# Altium PCB WoodStoveLayout1.PcbDoc (part 4 of 4)
Units mil, origin at the board's own origin, x right, y up, seen from the top; angles counter-clockwise.
Board outline 4000 x 3000 mil, 4 copper layers (Top Layer, L2, L3, Bottom Layer), stack 64.6 mil thick; 132 components, 92 nets, 551 pads, 53 vias.
Unrouted connection lines stored in the file: 224.
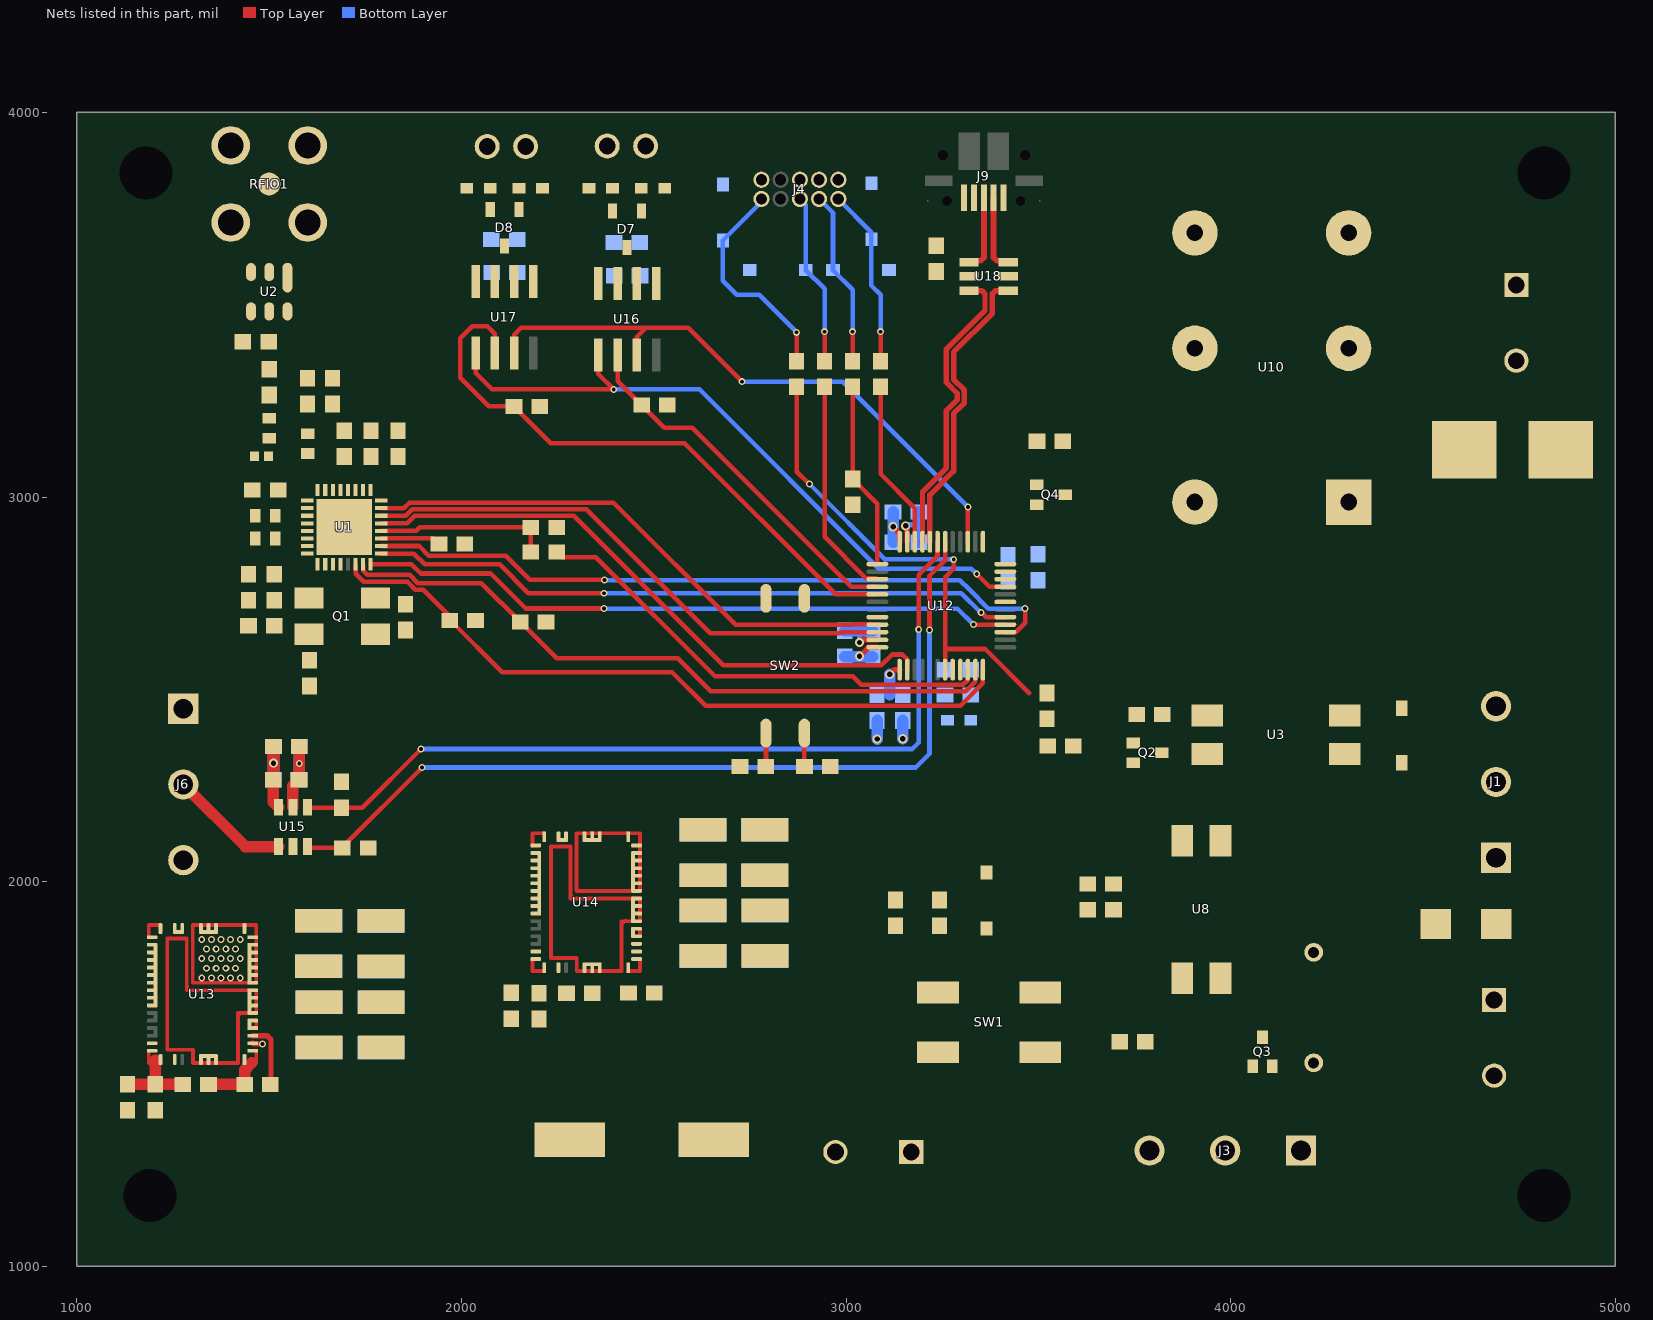
[diagram p4: the nets of this part, all layers, seen from the top]

## Part data (continued)
R8: Case/Package=0603, Case Code (Metric)=1608, Manufacturer=Vishay, Manufacturer Part Number=CRCW0603110RFKEA, Max Operating Temperature=155°C, Max Power Dissipation=100mW, Min Operating Temperature=-55°C, Package Quantity=10, Resistance=110, Supplier Part Number 1=541-110HTR-ND, Temperature Coefficient=100ppm/°C, Tolerance=1%, Voltage Rating=75V, Case Code (Imperial)=0603, ComponentLink1Description=https://datasheet.ciiva.com/11809/0900766b80d98afc-11809778.pdf, ComponentLink1URL=https://datasheet.ciiva.com/11809/0900766b80d98afc-11809778.pdf, ComponentLink2Description=https://datasheet.ciiva.com/2525/dcrcwe3-2525299.pdf, ComponentLink2URL=https://datasheet.ciiva.com/2525/dcrcwe3-2525299.pdf, ComponentLink3Description=https://datasheet.ciiva.com/2525/dcrcwe3-2525300.pdf, ComponentLink3URL=https://datasheet.ciiva.com/2525/dcrcwe3-2525300.pdf, ComponentLink4Description=https://datasheet.ciiva.com/2525/dcrcwe3-2525301.pdf, ComponentLink4URL=https://datasheet.ciiva.com/2525/dcrcwe3-2525301.pdf, ComponentLink5Description=https://datasheet.ciiva.com/7822/1697337-7822981.pdf, ComponentLink5URL=https://datasheet.ciiva.com/7822/1697337-7822981.pdf, ComponentLink6Description=https://datasheet.ciiva.com/16758/70201119-16758821.pdf, ComponentLink6URL=https://datasheet.ciiva.com/16758/70201119-16758821.pdf, ComponentLink7Description=https://datasheet.ciiva.com/3256/dcrcwe3-3256966.pdf, ComponentLink7URL=https://datasheet.ciiva.com/3256/dcrcwe3-3256966.pdf, ComponentLink8Description=https://datasheet.ciiva.com/7822/1697337-7822982.pdf, ComponentLink8URL=https://datasheet.ciiva.com/7822/1697337-7822982.pdf, ComponentLink9Description=https://datasheet.ciiva.com/3256/dcrcwe3-3256967.pdf, ComponentLink9URL=https://datasheet.ciiva.com/3256/dcrcwe3-3256967.pdf, ComponentLink10Description=https://datasheet.ciiva.com/26316/fld-crcw-e3-data-en-26316567.pdf, ComponentLink10URL=https://datasheet.ciiva.com/26316/fld-crcw-e3-data-en-26316567.pdf, ComponentLink11Description=https://datasheet.ciiva.com/16787/70201119-16787496.pdf, ComponentLink11URL=https://datasheet.ciiva.com/16787/70201119-16787496.pdf, ComponentLink12Description=https://datasheet.ciiva.com/7792/125364-7792010.pdf, ComponentLink12URL=https://datasheet.ciiva.com/7792/125364-7792010.pdf, ComponentLink13Description=https://datasheet.ciiva.com/16885/dcrcwe3-16885194.pdf, ComponentLink13URL=https://datasheet.ciiva.com/16885/dcrcwe3-16885194.pdf, ComponentLink14Description=https://datasheet.ciiva.com/22674/1912744-22674701.pdf, ComponentLink14URL=https://datasheet.ciiva.com/22674/1912744-22674701.pdf, ComponentLink15Description=https://datasheet.ciiva.com/22707/1697337-22707342.pdf, ComponentLink15URL=https://datasheet.ciiva.com/22707/1697337-22707342.pdf, Composition="Thick Film", Contact Plating=Tin, Depth=0.85mm, Height=0.45mm, Lead Free="Lead Free", Length=1.55mm, Military Standard=Not, Mount="Surface Mount", Number of Pins=2, Number of Terminations=2, Packaging="Tape and Reel", Power Rating=100mW, Pricing 1="5000=0.00497, 10000=0.00432, 25000=0.00405 (USD)", Radiation Hardening=No, REACH SVHC=Unknown, Stock 1=35000, Supplier 1=Digi-Key, Termination=SMD/SMT, Voltage Rating (DC)=75V, Weight=7.1E-05oz, Width=0.033inch
R9: Case/Package=Axial, Manufacturer="Stackpole Electronics", Manufacturer Part Number=CFM12JT560R, Max Operating Temperature=155°C, Max Power Dissipation=500mW, Min Operating Temperature=-55°C, Package Quantity=5000, Resistance=560, Supplier Part Number 1=S560HTR-ND, Temperature Coefficient=-400ppm/°C, Tolerance=5%, ComponentLink1Description=https://www.seielect.com/Catalog/SEI-CF_CFM.pdf, ComponentLink1URL=https://www.seielect.com/Catalog/SEI-CF_CFM.pdf, Composition="Carbon Film", Contact Plating=Tin,Matte, Diameter=2.3mm, Lead Free="Lead Free", Length=0.256inch, Mount="Through Hole,Axial", Number of Terminations=2, Packaging="Tape and Reel", Pricing 1="5000=0.00703, 10000=0.00611, 25000=0.00537, 50000=0.00492, 125000=0.00482 (USD)", Radiation Hardening=No, Stock 1=0, Supplier 1=Digi-Key
R11: Case/Package=0603, Case Code (Metric)=1608, Manufacturer=Vishay, Manufacturer Part Number=CRCW060368R0FKEA, Max Operating Temperature=155°C, Max Power Dissipation=100mW, Min Operating Temperature=-55°C, Package Quantity=10, Resistance=68, Supplier Part Number 1=541-68.0HTR-ND, Temperature Coefficient=100ppm/°C, Tolerance=1%, Voltage Rating=75V, Case Code (Imperial)=0603, ComponentLink1Description=https://datasheet.ciiva.com/2494/dcrcwe3-2494368.pdf, ComponentLink1URL=https://datasheet.ciiva.com/2494/dcrcwe3-2494368.pdf, ComponentLink2Description=https://datasheet.ciiva.com/11809/0900766b80d98afc-11809013.pdf, ComponentLink2URL=https://datasheet.ciiva.com/11809/0900766b80d98afc-11809013.pdf, ComponentLink3Description=https://datasheet.ciiva.com/8337/dcrcwe3-8337350.pdf, ComponentLink3URL=https://datasheet.ciiva.com/8337/dcrcwe3-8337350.pdf, ComponentLink4Description=https://datasheet.ciiva.com/7777/1697337-7777608.pdf, ComponentLink4URL=https://datasheet.ciiva.com/7777/1697337-7777608.pdf, ComponentLink5Description=https://datasheet.ciiva.com/16770/70201119-16770904.pdf, ComponentLink5URL=https://datasheet.ciiva.com/16770/70201119-16770904.pdf, ComponentLink6Description=https://datasheet.ciiva.com/2494/dcrcwe3-2494366.pdf, ComponentLink6URL=https://datasheet.ciiva.com/2494/dcrcwe3-2494366.pdf, ComponentLink7Description=https://datasheet.ciiva.com/22870/70201119-22870302.pdf, ComponentLink7URL=https://datasheet.ciiva.com/22870/70201119-22870302.pdf, ComponentLink8Description=https://datasheet.ciiva.com/2494/dcrcwe3-2494367.pdf, ComponentLink8URL=https://datasheet.ciiva.com/2494/dcrcwe3-2494367.pdf, ComponentLink9Description=https://datasheet.ciiva.com/16200/dcrcw-16200591.pdf, ComponentLink9URL=https://datasheet.ciiva.com/16200/dcrcw-16200591.pdf, Composition="Thick Film", Contact Plating=Tin, Depth=0.85mm, Height=0.45mm, Lead Free="Lead Free", Length=1.55mm, Military Standard=Not, Number of Terminations=2, Packaging="Tape and Reel", Power Rating=100mW, Pricing 1="5000=0.00497, 10000=0.00432, 25000=0.00405 (USD)", Radiation Hardening=No, REACH SVHC=Unknown, Stock 1=0, Supplier 1=Digi-Key, Termination=SMD/SMT, Voltage Rating (DC)=75V, Weight=7.1E-05oz, Width=0.033inch
R13 R14 R15 R16 R24 R25: Case/Package=0603, Case Code (Metric)=1608, Manufacturer=Vishay, Manufacturer Part Number=CRCW060322R0FKEA, Max Operating Temperature=155°C, Min Operating Temperature=-55°C, Package Quantity=5000, Power Rating=100mW, Resistance=22R, Supplier Part Number 1=541-22.0HTR-ND, Temperature Coefficient=100ppm/°C, Tolerance=1%, Voltage Rating=75V, Case Code (Imperial)=0603, ComponentLink1Description=https://datasheet.ciiva.com/16382/dcrcwe3-16382261.pdf, ComponentLink1URL=https://datasheet.ciiva.com/16382/dcrcwe3-16382261.pdf, ComponentLink2Description=https://datasheet.ciiva.com/5552/dcrcwe3-109170-5552120.pdf, ComponentLink2URL=https://datasheet.ciiva.com/5552/dcrcwe3-109170-5552120.pdf, ComponentLink3Description=https://datasheet.ciiva.com/22700/1697337-22700361.pdf, ComponentLink3URL=https://datasheet.ciiva.com/22700/1697337-22700361.pdf, ComponentLink4Description=https://datasheet.ciiva.com/11809/0900766b80d98afc-11809067.pdf, ComponentLink4URL=https://datasheet.ciiva.com/11809/0900766b80d98afc-11809067.pdf, ComponentLink5Description=https://datasheet.ciiva.com/7672/1697337-7672876.pdf, ComponentLink5URL=https://datasheet.ciiva.com/7672/1697337-7672876.pdf, ComponentLink6Description=https://datasheet.ciiva.com/15159/getdatasheetpartid-33090-15159388.pdf, ComponentLink6URL=https://datasheet.ciiva.com/15159/getdatasheetpartid-33090-15159388.pdf, ComponentLink7Description=https://datasheet.ciiva.com/7672/1697337-7672877.pdf, ComponentLink7URL=https://datasheet.ciiva.com/7672/1697337-7672877.pdf, ComponentLink8Description=https://datasheet.ciiva.com/26316/fld-crcw-e3-data-en-26316590.pdf, ComponentLink8URL=https://datasheet.ciiva.com/26316/fld-crcw-e3-data-en-26316590.pdf, ComponentLink9Description=https://datasheet.ciiva.com/16893/dcrcw-16893903.pdf, ComponentLink9URL=https://datasheet.ciiva.com/16893/dcrcw-16893903.pdf, Composition="Thick Film", Contact Plating=Tin,Lead, Depth=0.85mm, Height=0.45mm, Lead Free="Lead Free", Length=1.55mm, Military Standard=Not, Mount="Surface Mount", Packaging="Tape and Reel", Pricing 1="5000=0.00497, 10000=0.00432, 25000=0.00405 (USD)", Radiation Hardening=No, REACH SVHC=Unknown, Stock 1=0, Supplier 1=Digi-Key, Termination=SMD/SMT, Voltage Rating (DC)=75V, Weight=7.1E-05oz, Width=0.85mm
R22: Case/Package=0603, Case Code (Metric)=1608, Manufacturer=Vishay, Manufacturer Part Number=CRCW060310R0FKEA, Max Operating Temperature=155°C, Max Power Dissipation=100mW, Min Operating Temperature=-55°C, Package Quantity=10, Supplier Part Number 1=541-10.0HTR-ND, Temperature Coefficient=100ppm/°C, Tolerance=1%, Voltage Rating=75V, Case Code (Imperial)=0603, ComponentLink1Description=https://datasheet.ciiva.com/2465/dcrcwe3-2465699.pdf, ComponentLink1URL=https://datasheet.ciiva.com/2465/dcrcwe3-2465699.pdf, ComponentLink2Description=https://datasheet.ciiva.com/2465/dcrcwe3-2465700.pdf, ComponentLink2URL=https://datasheet.ciiva.com/2465/dcrcwe3-2465700.pdf, ComponentLink3Description=https://datasheet.ciiva.com/11808/0900766b80d98afc-11808660.pdf, ComponentLink3URL=https://datasheet.ciiva.com/11808/0900766b80d98afc-11808660.pdf, ComponentLink4Description=https://datasheet.ciiva.com/2465/dcrcwe3-2465701.pdf, ComponentLink4URL=https://datasheet.ciiva.com/2465/dcrcwe3-2465701.pdf, ComponentLink5Description=https://datasheet.ciiva.com/16740/dcrcwe3-16740661.pdf, ComponentLink5URL=https://datasheet.ciiva.com/16740/dcrcwe3-16740661.pdf, ComponentLink6Description=https://datasheet.ciiva.com/26316/fld-crcw-e3-data-en-26316582.pdf, ComponentLink6URL=https://datasheet.ciiva.com/26316/fld-crcw-e3-data-en-26316582.pdf, ComponentLink7Description=https://datasheet.ciiva.com/16781/70201119-16781847.pdf, ComponentLink7URL=https://datasheet.ciiva.com/16781/70201119-16781847.pdf, ComponentLink8Description=https://datasheet.ciiva.com/3256/dcrcwe3-3256955.pdf, ComponentLink8URL=https://datasheet.ciiva.com/3256/dcrcwe3-3256955.pdf, ComponentLink9Description=https://datasheet.ciiva.com/5547/dcrcwe3-109170-5547342.pdf, ComponentLink9URL=https://datasheet.ciiva.com/5547/dcrcwe3-109170-5547342.pdf, ComponentLink10Description=https://datasheet.ciiva.com/22673/1697337-22673071.pdf, ComponentLink10URL=https://datasheet.ciiva.com/22673/1697337-22673071.pdf, Composition="Thick Film", Contact Plating=Tin, Depth=0.85mm, Height=0.45mm, Lead Free="Lead Free", Length=1.55mm, Military Standard=Not, Mount="Surface Mount", Number of Pins=2, Number of Terminations=2, Packaging="Tape and Reel", Power Rating=100mW, Pricing 1="5000=0.00497, 10000=0.00432, 25000=0.00405 (USD)", REACH SVHC=Unknown, Resistance=10, Stock 1=0, Supplier 1=Digi-Key, Termination=SMD/SMT, Voltage Rating (DC)=75V, Weight=7.1E-05oz, Width=0.033inch
R29: Case/Package=0603, Case Code (Metric)=1608, Manufacturer="Vishay Dale", Manufacturer Part Number=M55342E12B40B2RWS, Max Operating Temperature=150°C, Max Power Dissipation=100mW, Min Operating Temperature=-55°C, Package Quantity=1, Resistance=40.2k, Supplier Part Number 1=M55342E12B40B2RWS-MIL, Temperature Coefficient=25ppm/°C, Tolerance=0.1%, Case Code (Imperial)=0603, ComponentLink1Description=https://datasheet.ciiva.com/16884/crcwhpe3-16884389.pdf, ComponentLink1URL=https://datasheet.ciiva.com/16884/crcwhpe3-16884389.pdf, ComponentLink2Description=https://datasheet.ciiva.com/9010/crcwhpe3-9010219.pdf, ComponentLink2URL=https://datasheet.ciiva.com/9010/crcwhpe3-9010219.pdf, ComponentLink3Description=https://datasheet.ciiva.com/2527/crcwhpe3-2527276.pdf, ComponentLink3URL=https://datasheet.ciiva.com/2527/crcwhpe3-2527276.pdf, ComponentLink4Description=https://datasheet.ciiva.com/2527/crcwhpe3-2527277.pdf, ComponentLink4URL=https://datasheet.ciiva.com/2527/crcwhpe3-2527277.pdf, ComponentLink5Description=https://datasheet.ciiva.com/2527/crcwhpe3-2527278.pdf, ComponentLink5URL=https://datasheet.ciiva.com/2527/crcwhpe3-2527278.pdf, ComponentLink6Description=http://www.vishay.com/docs/60018/eh.pdf, ComponentLink6URL=http://www.vishay.com/docs/60018/eh.pdf, Composition="Thin Film", Failure Rate=0.01%, Height=0.033inch, Length=0.064inch, Number of Terminations=2, Packaging=Tray, Stock 1=0, Supplier 1=Digi-Key, Width=0.032inch
R30: Case/Package=0603, Case Code (Metric)=1608, Manufacturer="TE Connectivity", Manufacturer Part Number=8-2176089-5, Max Operating Temperature=155°C, Max Power Dissipation=167mW, Min Operating Temperature=-55°C, Package Quantity=1, Resistance=88.7k, Supplier Part Number 1=A110295TR-ND, Temperature Coefficient=25ppm/°C, Tolerance=0.1%, Case Code (Imperial)=0603, ComponentLink1Description=https://datasheet.ciiva.com/41810/eng-ds-1773272-j-41810143.pdf, ComponentLink1URL=https://datasheet.ciiva.com/41810/eng-ds-1773272-j-41810143.pdf, ComponentLink2Description=https://datasheet.ciiva.com/41821/eng-ds-1773272-j-41821583.pdf, ComponentLink2URL=https://datasheet.ciiva.com/41821/eng-ds-1773272-j-41821583.pdf, Composition="Thin Film", Height=0.022inch, Length=0.061inch, Number of Terminations=2, Packaging="Tape and Reel", Pricing 1="1000=0.14518, 2000=0.1432 (USD)", Stock 1=0, Supplier 1=Digi-Key, Width=0.031inch
R32: Case/Package=0603, Case Code (Metric)=1608, Manufacturer="TE Connectivity", Manufacturer Part Number=3-2176089-1, Max Operating Temperature=155°C, Max Power Dissipation=167mW, Min Operating Temperature=-55°C, Package Quantity=1000, Power Rating=166mW, Resistance=23.2kR, Supplier Part Number 1=A110239TR-ND, Temperature Coefficient=25ppm/°C, Tolerance=0.1%, Voltage Rating=100V, Case Code (Imperial)=0603, ComponentLink1Description=https://datasheet.ciiva.com/41825/eng-ds-1773272-j-41825125.pdf, ComponentLink1URL=https://datasheet.ciiva.com/41825/eng-ds-1773272-j-41825125.pdf, ComponentLink2Description=https://datasheet.ciiva.com/41807/eng-ds-1773272-j-41807015.pdf, ComponentLink2URL=https://datasheet.ciiva.com/41807/eng-ds-1773272-j-41807015.pdf, ComponentLink3Description=https://datasheet.ciiva.com/41818/eng-ds-1773272-j-41818073.pdf, ComponentLink3URL=https://datasheet.ciiva.com/41818/eng-ds-1773272-j-41818073.pdf, Composition="Thin Film", Height=0.022inch, Length=0.061inch, Mount="Surface Mount", Number of Terminations=2, Packaging="Cut Tape", Pricing 1="1000=0.14518, 2000=0.1432 (USD)", REACH SVHC="No SVHC", Stock 1=1000, Supplier 1=Digi-Key, Voltage Rating (DC)=100V, Width=0.031inch
R33: Case/Package=0603, Case Code (Metric)=1608, Manufacturer="TE Connectivity", Manufacturer Part Number=2176090-2, Max Operating Temperature=155°C, Max Power Dissipation=167mW, Min Operating Temperature=-55°C, Package Quantity=1000, Resistance=133kR, Supplier Part Number 1=A110312TR-ND, Temperature Coefficient=25ppm/°C, Tolerance=0.1%, Case Code (Imperial)=0603, ComponentLink1Description=https://datasheet.ciiva.com/41823/eng-ds-1773272-j-41823608.pdf, ComponentLink1URL=https://datasheet.ciiva.com/41823/eng-ds-1773272-j-41823608.pdf, ComponentLink2Description=https://datasheet.ciiva.com/41810/eng-ds-1773272-j-41810377.pdf, ComponentLink2URL=https://datasheet.ciiva.com/41810/eng-ds-1773272-j-41810377.pdf, ComponentLink3Description=https://datasheet.ciiva.com/41824/eng-ds-1773272-j-41824430.pdf, ComponentLink3URL=https://datasheet.ciiva.com/41824/eng-ds-1773272-j-41824430.pdf, Composition="Thin Film", Depth=0.8mm, Height=0.022inch, Length=0.061inch, Military Standard=Not, Number of Terminations=2, Packaging="Tape and Reel", Pricing 1="1000=0.14518, 2000=0.1432 (USD)", Stock 1=0, Supplier 1=Digi-Key, Width=0.031inch
R39: Case/Package=0603, Case Code (Metric)=1608, Manufacturer=Panasonic, Manufacturer Part Number=ERJ-3EKF1502V, Max Operating Temperature=155°C, Max Power Dissipation=100mW, Min Operating Temperature=-55°C, Package Quantity=1, Resistance=15k, Supplier Part Number 1=P15.0KHTR-ND, Temperature Coefficient=100ppm/°C, Tolerance=1%, Voltage Rating=75V, Case Code (Imperial)=0603, ComponentLink1Description=https://datasheet.ciiva.com/16770/70260748-16770997.pdf, ComponentLink1URL=https://datasheet.ciiva.com/16770/70260748-16770997.pdf, ComponentLink2Description=https://datasheet.ciiva.com/7830/426256-7830982.pdf, ComponentLink2URL=https://datasheet.ciiva.com/7830/426256-7830982.pdf, ComponentLink3Description=https://datasheet.ciiva.com/24026/aoa0000ce2-24026054.pdf, ComponentLink3URL=https://datasheet.ciiva.com/24026/aoa0000ce2-24026054.pdf, ComponentLink4Description=https://datasheet.ciiva.com/6138/aoa0000ce2-6138183.pdf, ComponentLink4URL=https://datasheet.ciiva.com/6138/aoa0000ce2-6138183.pdf, ComponentLink5Description=https://datasheet.ciiva.com/48530/aoa0000ce2-48530983.pdf, ComponentLink5URL=https://datasheet.ciiva.com/48530/aoa0000ce2-48530983.pdf, ComponentLink6Description=https://datasheet.ciiva.com/9193/aoa0000ce2-9193001.pdf, ComponentLink6URL=https://datasheet.ciiva.com/9193/aoa0000ce2-9193001.pdf, ComponentLink7Description=https://datasheet.ciiva.com/16762/70260748-16762729.pdf, ComponentLink7URL=https://datasheet.ciiva.com/16762/70260748-16762729.pdf, ComponentLink8Description=https://datasheet.ciiva.com/22722/426256-22722779.pdf, ComponentLink8URL=https://datasheet.ciiva.com/22722/426256-22722779.pdf, ComponentLink9Description=https://datasheet.ciiva.com/7830/aoa0000ce2-7830732.pdf, ComponentLink9URL=https://datasheet.ciiva.com/7830/aoa0000ce2-7830732.pdf, ComponentLink10Description=https://datasheet.ciiva.com/46372/1678782-46372846.pdf, ComponentLink10URL=https://datasheet.ciiva.com/46372/1678782-46372846.pdf, ComponentLink11Description=https://datasheet.ciiva.com/46372/1678782-46372847.pdf, ComponentLink11URL=https://datasheet.ciiva.com/46372/1678782-46372847.pdf, Composition="Thick Film", Contact Plating=Tin, Depth=0.8mm, Height=0.022inch, Lead Free="Lead Free", Length=1.6mm, Military Standard=Not, Mount="Surface Mount", Number of Pins=2, Number of Terminations=2, Packaging="Tape and Reel", Power Rating=100mW, Pricing 1="5000=0.00751, 10000=0.00653, 25000=0.00573, 50000=0.00526, 125000=0.00515 (USD)", Radiation Hardening=No, REACH SVHC="No SVHC", Stock 1=0, Supplier 1=Digi-Key, Termination=SMD/SMT, Voltage Rating (DC)=75V, Width=0.031inch
RFIO1: "RF Connector SMA Straight PCB Jack Surface Mount 50 Ohm", Part No=132134-15
SW1: Case/Package=SMD/SMT, Contact Current Rating=50mA, Contact Resistance=100mR, IP Rating="IP67,Waterproof,Dust Tight", Manufacturer=Omron, Max Operating Temperature=70°C, Max Voltage Rating (DC)=24V, Min Operating Temperature=-25°C, Operating Force=1.57N, Package Quantity=1, Supplier Part Number 1=SW261TR-ND, ComponentLink1Description=https://datasheet.ciiva.com/1532/en-b3sn-1532676.pdf, ComponentLink1URL=https://datasheet.ciiva.com/1532/en-b3sn-1532676.pdf, ComponentLink2Description=https://datasheet.ciiva.com/16154/en-b3sn-16154998.pdf, ComponentLink2URL=https://datasheet.ciiva.com/16154/en-b3sn-16154998.pdf, ComponentLink3Description=https://datasheet.ciiva.com/2900/b3sn-1110-2900023.pdf, ComponentLink3URL=https://datasheet.ciiva.com/2900/b3sn-1110-2900023.pdf, ComponentLink4Description=https://datasheet.ciiva.com/5283/en-b3sn-371257-5283623.pdf, ComponentLink4URL=https://datasheet.ciiva.com/5283/en-b3sn-371257-5283623.pdf, ComponentLink5Description=https://datasheet.ciiva.com/2900/b3sn-1110-2900024.pdf, ComponentLink5URL=https://datasheet.ciiva.com/2900/b3sn-1110-2900024.pdf, ComponentLink6Description=https://datasheet.ciiva.com/2900/b3sn-1110-2900025.pdf, ComponentLink6URL=https://datasheet.ciiva.com/2900/b3sn-1110-2900025.pdf, ComponentLink7Description=https://datasheet.ciiva.com/15183/getdatasheetpartid-87284-15183738.pdf, ComponentLink7URL=https://datasheet.ciiva.com/15183/getdatasheetpartid-87284-15183738.pdf, ComponentLink8Description=https://datasheet.ciiva.com/30076/en-b3sn-30076973.pdf, ComponentLink8URL=https://datasheet.ciiva.com/30076/en-b3sn-30076973.pdf, Contact Material=Gold, Contact Plating=Gold, Current Rating=50mA, Depth=7mm, Electrical Life=50000Cycles, Height=3.1mm, Illumination Type=Non-Illuminated,Illuminated, Lead Free="Contains Lead", Length=6.5mm, Manufacturer Part Number=B3SN-3012P, Max Current Rating=50mA, Mechanical Life=100000Cycles, Mount="Surface Mount", Number of Poles=1, Orientation=Straight, Packaging="Tape and Reel", Pricing 1="3000=0.52365 (USD)", Radiation Hardening=No, REACH SVHC=Unknown, Stock 1=48000, Supplier 1=Digi-Key, Switch Function=Off-Mom, Switch Travel=0.25mm, Termination=SMD/SMT, Throw Configuration=SPST, Voltage Rating (DC)=24V, Weight=0.007055oz
SW2: Current Rating=100mA, Manufacturer=CTS, Manufacturer Part Number=219-2MSTR, Max Operating Temperature=85°C, Max Voltage Rating (DC)=20V, Min Operating Temperature=-55°C, Package Quantity=1000, Supplier Part Number 1=CT3114TR-ND, ComponentLink1Description=https://datasheet.ciiva.com/15210/getdatasheetpartid-92384-15210150.pdf, ComponentLink1URL=https://datasheet.ciiva.com/15210/getdatasheetpartid-92384-15210150.pdf, ComponentLink2Description=https://datasheet.ciiva.com/8679/219-8679450.pdf, ComponentLink2URL=https://datasheet.ciiva.com/8679/219-8679450.pdf, ComponentLink3Description=https://datasheet.ciiva.com/16316/219-16316219.pdf, ComponentLink3URL=https://datasheet.ciiva.com/16316/219-16316219.pdf, Contact Material=Copper, Contact Plating=Tin,Gold, Depth=9.91mm, Electrical Life=2000Cycles, Lead Free="Lead Free", Length=0.258inch, Max Current Rating=100mA, Mechanical Life=2000Cycles, Mount="Surface Mount", Number of Positions=2, Orientation=Straight, Packaging="Tape and Reel", Pitch=0.1inch, Pricing 1="1000=0.441, 5000=0.3591 (USD)", Radiation Hardening=No, Stock 1=16000, Supplier 1=Digi-Key, Terminal Pitch=2.54mm, Termination="Gull Wing", Throw Configuration=SPST, Voltage Rating (DC)=20V, Washable=Yes
U1: "SX1211I084"
U3 U8: "OPTOISOLATOR 5KV TRANSISTOR 4SMD 20mA/1.2V saturation", Case/Package=SMD/SMT, Collector Emitter Saturation Voltage=200mV, Current Transfer Ratio=600%, Forward Current=50mA, Forward Voltage=1.4V, Isolation Voltage=5kV, Manufacturer="ON Semiconductor / Fairchild", Max Operating Temperature=110°C, Max Output Voltage=70V, Max Power Dissipation=200mW, Min Operating Temperature=-55°C, Package Quantity=1, Reverse Breakdown Voltage=6V, Supplier Part Number 1=FOD817D3SDTR-ND, Collector Emitter Voltage (VCEO)=200mV, ComponentLink1Description=https://datasheet.ciiva.com/25620/0900766b810e24fa-25620565.pdf, ComponentLink1URL=https://datasheet.ciiva.com/25620/0900766b810e24fa-25620565.pdf, ComponentLink2Description=https://datasheet.ciiva.com/26122/fod817d-26122105.pdf, ComponentLink2URL=https://datasheet.ciiva.com/26122/fod817d-26122105.pdf, ComponentLink3Description=https://datasheet.ciiva.com/15118/getdatasheetpartid-67082-15118458.pdf, ComponentLink3URL=https://datasheet.ciiva.com/15118/getdatasheetpartid-67082-15118458.pdf, ComponentLink4Description=https://datasheet.ciiva.com/2086/fod817d-2086155.pdf, ComponentLink4URL=https://datasheet.ciiva.com/2086/fod817d-2086155.pdf, ComponentLink5Description=https://datasheet.ciiva.com/46433/1563587-46433595.pdf, ComponentLink5URL=https://datasheet.ciiva.com/46433/1563587-46433595.pdf, ComponentLink6Description=https://datasheet.ciiva.com/2086/fod817d-2086156.pdf, ComponentLink6URL=https://datasheet.ciiva.com/2086/fod817d-2086156.pdf, ComponentLink7Description=https://datasheet.ciiva.com/2086/fod817d-2086157.pdf, ComponentLink7URL=https://datasheet.ciiva.com/2086/fod817d-2086157.pdf, ComponentLink8Description=https://datasheet.ciiva.com/8095/fod817d-8095549.pdf, ComponentLink8URL=https://datasheet.ciiva.com/8095/fod817d-8095549.pdf, ComponentLink9Description=https://datasheet.ciiva.com/4701/fod817d-4701711.pdf, ComponentLink9URL=https://datasheet.ciiva.com/4701/fod817d-4701711.pdf, ComponentLink10Description=https://datasheet.ciiva.com/17001/fod817-17001647.pdf, ComponentLink10URL=https://datasheet.ciiva.com/17001/fod817-17001647.pdf, Fall Time=18000ns, Input Current=50mA, Lead Free="Lead Free", Manufacturer Part Number=FOD817D3SD, Max Collector Current=50mA, Max Input Current=50mA, Mount="Surface Mount", Number of Channels=1, Number of Circuits=1, Number of Elements=1, Number of Pins=4, Output Current per Channel=50mA, Output Voltage=70V, Packaging="Tape and Reel", Power Dissipation=200mW, Pricing 1="1000=0.15939, 2000=0.14611, 5000=0.13283, 10000=0.12397, 25000=0.11954, 50000=0.11512 (USD)", Radiation Hardening=No, REACH SVHC="No SVHC", Rise Time=18000ns, Stock 1=123000, Supplier 1=Digi-Key, Weight=0g
U5: "DIODE SCHOTTKY 40V 1A SOD123"
U10: "RELAY GENERAL PURPOSE DPST 8A 3V 67mA coil drive 45ohm coil resistance"
U11: Case/Package=SMD/SMT, Current Rating=2A, DC Cold Resistance=39mR, Manufacturer=Bel, Manufacturer Part Number=SSQ2, Max Operating Temperature=125°C, Min Operating Temperature=-55°C, Supplier Part Number 1=507-1048-2-ND, Voltage Rating (AC)=125V, Approvals=CSA,CE,cULus, ComponentLink1Description=https://datasheet.ciiva.com/300/ssq-300722.pdf, ComponentLink1URL=https://datasheet.ciiva.com/300/ssq-300722.pdf, ComponentLink2Description=https://datasheet.ciiva.com/300/ssq-300723.pdf, ComponentLink2URL=https://datasheet.ciiva.com/300/ssq-300723.pdf, ComponentLink3Description=https://datasheet.ciiva.com/300/ssq-300724.pdf, ComponentLink3URL=https://datasheet.ciiva.com/300/ssq-300724.pdf, Fuse Type="Board Mount (Cartridge Style Excluded)", Height=0.1inch, Length=0.24inch, Mount="Surface Mount", Packaging="Tape and Reel", Pricing 1="1000=0.15908, 2000=0.14847, 3000=0.14582, 5000=0.14317, 10000=0.13787 (USD)", Stock 1=59000, Supplier 1=Digi-Key, Voltage Rating (DC)=125V, Width=0.1inch
U12: library part STM32L433CCTx
U13 U14: "4V to 36V, 2A Step-Down DC/DC Power Module"
U15: "Self-Calibrating, 16-Bit Analog-to-Digital Converter 6-SOT-23 -40 to 85"
U16 U17: "K type thermocouple amplifier"
U18: "2-Channel Ultra Low Clamp Voltage ESD Solution with Series-Resistor Isolation 6-SOT-23 -40 to 85", Package="SOT-23-6 Texas Instruments", Availability=Good, MF="Texas Instruments", MP=TPD2S017DBVR, Price="0.32 USD", SnapEDA_Link=https://www.snapeda.com/parts/TPD2S017DBVR/Texas%20Instruments/view-part/?ref=snap

## Free pads (board coordinates)
  round 60 hole 137.8 unplated: 2(1180,3842) 2(1191,1184) 2(4815,1184) 2(4815,3842)

## Via types
v1: diameter 18, hole 10, Top Layer to Bottom Layer, tented top, 23 vias
v2: diameter 18, hole 10, Top Layer to Bottom Layer, 22 vias
v3: diameter 24, hole 14, Top Layer to Bottom Layer, 8 vias

## Nets (pads, with @x,y where several pads share a name; then routed paths per layer and width w, separated by ;. In a path a pad name is that pad's centre, name@x,y a point inside that pad or via, vN(x,y) a via of type N, cw(c..) or ccw(c..) an arc to the next point about the centre after c; other vN are vias at no path point)
3VSWRelief: U14.9 U14.10 U14.11
"5V PWM": J1.3 U3.4 U5.C
5VSWRelief: U13.9 U13.10 U13.11
12V: J3.1 Q3.3
12VFAN: D?.1 J1.1 J2.1
+3V3: C1.2 C16.2 C17.2 C18.2 C19.2 C20.2 C21.2 C22.2 C23.2 C39.2 C40.2 C41.2 C42.2 C43.2 C48.2 C49.2 C50.2 C51.2 FB1.1 J4.1 R1.2 R4.2 R5.2 R8.1 R10.2 R11.1 R17.2 R22.2 R23.2 R27.2 R32.2 R35.2 R36.2 R37.2 R38.2 U1.26 U12.1 U12.24 U12.36 U12.48 U14.6 U14.7 U14.8 U16.4 U17.4 | length 337.5
  Top Layer w14: v3(3035,2586) 3058.3,2609.3 U12.48@3081.52,2609.3 ; v3(3114,2539) 3126.23,2551.23 U12.1@3139.59,2551.23 ; v3(3122.4,2922.6) 3139.59,2905.41 U12.36@3139.59,2883.91
  Bottom Layer w14: v3(3122.4,2922.6) v3@3122.4,2927
  Bottom Layer w30: C21.2@2996.86,2585.11 C17.2@3069.85,2585.11 ; 3114,2486.04 v3(3114,2539) ; C18.2@3122.4,2882.57 v3(3122.4,2922.6) ; v3@3122.4,2927 C22.2@3122.4,2961.49
+5V: C29.2 C30.2 C31.2 C32.2 C33.2 C44.2 C45.2 C46.2 C47.2 J6.1 R29.2 U13.6 U13.7 U13.8 U15.5 | length 251.6
  Top Layer w30: U15.5@1562,2193.66 1562,2249 C45.2@1578,2265 v2@1578,2307.39 ; v2(1578.39,2307.39) C44.2@1578.39,2351.48
  Bottom Layer w30: C46.2@1578,2265 1578.39,2265.39 v2(1578.39,2307.39) ; v2@1578,2307 v2(1578.39,2307.39) ; C47.2@1578.39,2351.48 v2(1578.39,2307.39)
  other v1: 1325,1750 1350,1750 1375,1750 1400,1750 1425,1750 1337.5,1775 1362.5,1775 1387.5,1775 1412.5,1775 1325,1800 1350,1800 1375,1800 1400,1800 1425,1800 1337.5,1825 1362.5,1825 1387.5,1825 1412.5,1825 1325,1850 1350,1850 1375,1850 1400,1850 1425,1850
+12V: C25.2 C26.2 C27.2 C28.2 C34.1 C35.2 C36.2 C37.2 C38.2 J10.2 U13.2 U13.4 U14.2 U14.4 | length 26.1
  Top Layer w14: U13.2@1457.7,1579.95 U13.2@1457.7,1579.95 1459.75,1578 v2(1483,1578)
"AC In": J5.2 U11.1
"AC Out": J5.1 U10.4
ACFUSE: U10.3 U11.2
DoorSig: J3.2 Q3.1
FANGND: D?.2 J1.2 J2.2 U3.3 U5.A
GND: C1.1 C2.1 C3.1 C4.2 C6.1 C7.1 C8.1 C11.2 C14.1 C15.1 C16.1 C17.1 C18.1 C19.1 C20.1 C21.1 C22.1 C23.1 C25.1 C26.1 C27.1 C28.1 C30.1 C31.1 C32.1 C33.1 C34.2 C35.1 C36.1 C37.1 C38.1 C40.1 C41.1 C42.1 C43.1 C44.1 C45.1 C46.1 C47.1 C48.1 C49.1 C50.1 C51.1 D2.A D3.A D4.A D5.A D6.A D7.3 D8.3 J3.3 J4.3 J4.5 J4.9 J6.3 J9.5 J10.1 Q1.2 Q1.4 Q2.2 Q4.2 R3.1 R7.1 R25.2 R28.1 R39.1 RFIO1.P1 RFIO1.P2 RFIO1.P3 RFIO1.P4 SW1.3 SW1.4 U1.0 U1.1 U1.2 U1.8 U1.9 U1.12 U1.24 U1.25 U1.30 U1.32 U2.1 U2.3 U2.4 U2.6 U8.2 U8.3 U10.5 U10.6 U12.8 U12.23 U12.35 U12.47 U13.5 U13.14 U13.18 U14.5 U14.14 U14.18 U15.2 U15.6 U16.1 U17.1 U18.2 | length 662.5
  Top Layer w14: v3(3035,2622) 3041.99,2628.99 U12.47@3081.52,2628.99 ; v3(3155,2925) 3159.28,2920.72 U12.35@3159.28,2883.91
  Top Layer w30: C44.1@1511.46,2351.48 v3(1511.46,2308.44) 1511.46,2265.39 C45.1@1511.07,2265 1511.07,2207.19 U15.6@1524.6,2193.66
  Bottom Layer w14: 3033,2652.04 3035,2650.04 v3(3035,2622) ; v3(3155,2925) 3152,2928 3189.32,2928
  Bottom Layer w30: C46.1@1511.07,2265 1511.46,2265.39 v3(1511.46,2308.44) C47.1@1511.46,2351.48 ; C21.1@2996.86,2652.04 3033,2652.04 C17.1@3069.85,2652.04 ; v3(3080.86,2371) C20.1@3080.86,2419.11 ; v3(3147.59,2371.59) C16.1@3147.59,2419.11 ; C18.1@3189.32,2882.57 3189.32,2928 C22.1@3189.32,2961.49
NetC2_2: C2.2 U1.27
NetC3_2: C3.2 U1.28
NetC4_1: C4.1 Q1.3 U1.11
NetC5_1: C5.1 C6.2 U2.5
NetC5_2: C5.2 L2.1
NetC7_2: C7.2 Q1.1 U1.10
NetC8_2: C8.2 L1.1 L2.2 U1.31
NetC9_1: C9.1 C12.1 U1.6
NetC9_2: C9.2 R6.2 U1.7
NetC10_1: C10.1 R7.2
NetC10_2: C10.2 L1.2 U1.29
NetC11_1: C11.1 L3.1 L4.1 U1.3
NetC12_2: C12.2 R6.1
NetC13_2: C13.2 R25.1
NetC14_2: C14.2 C15.2 FB1.2 U12.9
NetC29_1: C29.1 R29.1 R31.2 U13.15 U13.16 | length 206.4
  Top Layer w30: C29.1@1131.8,1472.91 R29.1@1204.16,1472.91 ; 1204.16,1535.68 1204.16,1528.77 R29.1@1204.16,1472.91 ; R31.2@1275.42,1472.91 R29.1@1204.16,1472.91
NetC39_1: C39.1 R32.1 R34.2 U14.15 U14.16
NetD1_1: D1.1 R10.1 U8.4 U12.19
NetD1_2: D1.2 R11.2
NetD2_C: D2.C J4.2 R16.2 | length 467.1
  Top Layer w12: R16.2@3090,3353.46 v2(3090,3430)
  Bottom Layer w12: J4.2@2980,3775.04 3066.04,3689.01 D2.C@3066.04,3670 3066.04,3550 3090,3526.04 v2(3090,3430)
NetD3_C: D3.C J4.4 R15.2 | length 457.7
  Top Layer w12: R15.2@3017.21,3353.46 v2(3017.21,3430)
  Bottom Layer w12: J4.4@2930,3775.04 2966.26,3738.79 D3.C@2966.26,3590 3017.21,3539.05 v2(3017.21,3430)
NetD4_C: D4.C J4.6 R14.2 | length 448.3
  Top Layer w12: R14.2@2944.42,3353.46 v2(2944.42,3430)
  Bottom Layer w12: J4.6@2880,3775.04 2895.67,3759.37 D4.C@2895.67,3590 2944.42,3541.25 v2(2944.42,3430)
NetD5_C: D5.C J4.10 R13.2 | length 576.4
  Top Layer w12: R13.2@2871.63,3353.46 v2(2871.63,3428.37)
  Bottom Layer w12: J4.10@2780,3775.04 2780,3767.17 D5.C@2680,3667.17 2680,3562 2715.96,3526.04 2773.96,3526.04 v2(2871.63,3428.37)
NetD6_C: D6.C R23.1 R24.2 SW1.1 SW1.2
NetD7_1: D7.1 FB2.2 U16.2
NetD7_2: D7.2 FB3.2 U16.3
NetD8_1: D8.1 FB4.2 U17.2
NetD8_2: D8.2 FB5.2 U17.3
NetFB2_1: FB2.1 J7.2
NetFB3_1: FB3.1 J7.1
NetFB4_1: FB4.1 J8.2
NetFB5_1: FB5.1 J8.1
NetJ9_4: J9.4 R39.2
NetL3_2: L3.2 U1.4
NetL4_2: L4.2 U1.5
NetQ2_1: Q2.1 U12.22
NetQ2_3: Q2.3 U3.2
NetQ3_2: Q3.2 R9.2
NetQ4_1: Q4.1 U12.25
NetQ4_3: Q4.3 U10.1
NetR1_1: R1.1 R2.1 U1.20 | length 456.7
  Top Layer w12: U1.20@1791.59,2912.11 1883.08,2912.11 1892.04,2921.06 R1.1@2180.63,2921.06 R2.1@2180.63,2857.06
NetR2_2: R2.2 U12.10 | length 1244.4
  Top Layer w12: R2.2@2247.56,2857.06 2261.24,2843.37 2349.84,2843.37 2659.41,2533.8 3017.42,2533.8 3039.53,2511.69 3304.07,2511.69 3316.66,2524.28 3316.66,2551.14 U12.10@3316.76,2551.23
NetR3_2: R3.2 U1.19 | length 156.2
  Top Layer w12: U1.19@1791.59,2892.42 1791.9,2892.74 1926.95,2892.74 R3.2@1941.63,2878.06
NetR4_1: R4.1 U1.14 U12.12 | length 1865
  Top Layer w12: U1.14@1724.86,2825.69 1724.86,2800.39 1745.86,2779.39 1859.96,2779.39 1879.96,2759.39 1900.38,2759.39 1969.63,2690.14 R4.1@1969.63,2679.06 1971.6,2679.06 2105.8,2544.86 2547.67,2544.86 2635.3,2457.22 3297.69,2457.22 3356.03,2515.56 3356.03,2551.14 U12.12@3356.13,2551.23
NetR5_1: R5.1 U1.15 U12.11 | length 1780.7
  Top Layer w12: U1.15@1744.54,2825.69 1744.54,2808.56 1755,2798.1 1865.29,2798.1 1887,2776.39 2052.13,2776.39 R5.1@2153.13,2675.39 2247.88,2580.64 2562.23,2580.64 2648.18,2494.69 3311.12,2494.69 3336.35,2519.92 3336.35,2551.14 U12.11@3336.44,2551.23
NetR8_2: R8.2 U3.1
NetR9_1: R9.1 U8.1
NetR14_1: R14.1 U12.39 | length 572.6
  Top Layer w12: R14.1@2944.42,3286.54 2944.42,2896.71 3051.88,2789.25 3078.74,2789.25 U12.39@3081.52,2786.47
NetR15_1: R15.1 R17.1 U12.37 | length 487.3
  Top Layer w12: R15.1@3017.21,3286.54 3017.21,3047.15 R17.1@3017.42,3046.94 3081.52,2982.83 U12.37@3081.52,2825.84
NetR16_1: R16.1 U12.34 | length 439.5
  Top Layer w12: R16.1@3090,3286.54 3090,3060 3178.96,2971.04 U12.34@3178.96,2883.91
NetR22_1: R22.1 U10.8
NetR27_1: R27.1 SW2.3 | length 87
  Top Layer w12: R27.1@2791.32,2299.57 2791.86,2300.11 SW2.3@2791.86,2386.37
NetR28_2: R28.2 SW2.4 | length 86.8
  Top Layer w12: SW2.4@2891.86,2386.37 R28.2@2891.93,2299.57 R28.2@2891.93,2299.57
NetR30_1: R30.1 R31.1 U13.1 | length 157.5
  Top Layer w30: R31.1@1342.35,1472.91 1342.44,1473 R30.1@1436.54,1473 1436.54,1510.78 1454.53,1528.77
NetR30_2: R30.2 U13.3 | length 170.9
  Top Layer w14: U13.3@1457.7,1599.64 1495.06,1599.64 1505,1589.7 1505,1479.37 R30.2@1511.46,1472.91
NetR33_1: R33.1 R34.1 U14.1
NetR33_2: R33.2 U14.3
NetR35_1: R35.1 U12.30 U15.3 | length 2289.1
  Top Layer w12: U15.3@1599.4,2091.3 1602.7,2088 R35.1@1690.54,2088 1690.54,2089.54 v2(1898,2297) ; v2(3217,2654) 3217,2795 3257.7,2835.7 U12.30@3257.7,2883.91
  Bottom Layer w12: v2(1898,2297) 3181,2297 3217,2333 v2(3217,2654)
NetR36_1: R36.1 U12.31 U15.4 | length 2202.5
  Top Layer w12: U15.4@1599.4,2193.66 1600.53,2192.54 R36.1@1688,2192.54 1742.54,2192.54 v2(1895,2345) ; v2(3189,2656) 3189,2798 3238.02,2847.02 U12.31@3238.02,2883.91
  Bottom Layer w12: v2(1895,2345) 3172,2345 3189,2362 v2(3189,2656)
NetR37_1: R37.1 U12.40 U16.6 | length 965.1
  Top Layer w12: U16.6@2406.09,3369.61 2406.09,3301.44 R37.1@2468.54,3239 2527.54,3180 2600,3180 3013.22,2766.78 U12.40@3081.52,2766.78
NetR38_1: R38.1 U12.41 U17.6 | length 1582
  Top Layer w12: U17.6@2087.09,3374.61 2087,3374.52 2087,3425 2068,3444 2028,3444 1997,3413 1997,3310 2071.33,3235.67 R38.1@2136.63,3235.67 2232.3,3140 2580,3140 2972.9,2747.1 U12.41@3081.52,2747.1
NetRFIO1_1: RFIO1.1 U2.2
NetSW2_1: SW2.1 SW2.2 U12.44
NetU1_16: U1.16 U12.16 | length 1713.6
  Top Layer w12: U1.16@1764.23,2825.69 1869.7,2825.69 1894,2801.39 2076.61,2801.39 2167.61,2710.39 v2@2369.58,2710.39 ; v2(3331.64,2668.36) U12.16@3414.2,2668.36
  Bottom Layer w12: v2(2371,2710) 3290,2710 v2(3331.64,2668.36)
NetU1_17: U1.17 U12.17 | length 1689.4
  Top Layer w12: U1.17@1791.59,2853.05 1876.34,2853.05 1904.38,2825 2099.38,2825 2174,2750.39 v2@2369.58,2750.39 ; v2(3351.55,2700) 3353.17,2700 3365.13,2688.04 U12.17@3414.2,2688.04
  Bottom Layer w12: v2(2371,2750) 3300,2750 3350,2700 v2(3351.55,2700)
NetU1_18: U1.18 U12.15 | length 1837.2
  Top Layer w12: U1.18@1791.59,2872.74 1890.06,2872.74 1915.42,2847.37 2115.01,2847.37 2177.42,2784.96 v2@2369.58,2784.96 ; U12.15@3414.2,2648.67 3414.29,2648.77 3441.15,2648.77 3465.72,2673.33 v2(3465.72,2710)
  Bottom Layer w12: v2(2372,2784) 3296.05,2784 3321.25,2758.8 3321.25,2758.58 3369.83,2710 v2(3465.72,2710)
NetU1_21: U1.21 U12.2 | length 1580.6
  Top Layer w12: U1.21@1791.59,2931.79 1859.2,2931.79 1879.15,2951.74 2291.82,2951.74 2680.56,2563 3092,2563 3119.78,2590.78 3146.59,2590.78 3159.18,2578.19 3159.18,2551.33 U12.2@3159.28,2551.23
NetU1_22: U1.22 U12.46 | length 1431.6
  Top Layer w12: U1.22@1791.59,2951.48 1854.84,2951.48 1872.11,2968.74 2325.16,2968.74 2647.55,2646.36 2986.16,2646.36 2988.48,2648.67 U12.46@3081.52,2648.67
NetU1_23: U1.23 U12.45 | length 1428
  Top Layer w12: U1.23@1791.59,2971.16 1850.48,2971.16 1865.07,2985.74 2395.49,2985.74 2712.87,2668.36 3016.81,2668.36 3017.44,2668.99 3080.89,2668.99 U12.45@3081.52,2668.36
NetU12_21: U12.21 U16.5 U17.5 | length 1765.6
  Top Layer w12: U17.5@2037.09,3374.61 2037.09,3322.5 2079.59,3280 v2(2396.09,3280) 2356.09,3320 U16.5@2356.09,3369.61 ; v2(3340,2800) 3373.22,2766.78 U12.21@3414.2,2766.78
  Bottom Layer w12: v2(2396.09,3280) 2619,3280 3085,2814 3326,2814 v2(3340,2800)
NetU12_27: U12.27 U16.7 U17.7 | length 1598.2
  Top Layer w12: U17.7@2137.09,3374.61 2137.09,3422.15 2154.94,3440 2480,3440 ; U16.7@2456.09,3369.61 2456.09,3416.09 2480,3440 ; v2(2730,3300) 2590,3440 2480,3440 ; U12.27@3316.76,2883.91 v2(3316.76,2974.36)
  Bottom Layer w12: v2(2730,3300) 2991.12,3300 v2(3316.76,2974.36)
PSENSOR: J6.2 U15.1 | length 314.5
  Top Layer w30: J6.2@1277,2252.85 1438.55,2091.3 U15.1@1524.6,2091.3
RSTNET: C13.1 R13.1 R24.1 U12.7 | length 1286.2
  Top Layer w12: R13.1@2871.63,3286.54 2871.63,3066.37 2904,3034 v2(2905,3034) ; U12.7@3257.7,2551.23 3257.7,2605 ; v2(3280,2838) 3280,2814.3 3257.7,2792 3257.7,2605 ; 3476.54,2490.46 3362,2605 3257.7,2605
  Bottom Layer w12: v2(2905,3034) 3102,2837 3103,2838 v2(3280,2838)
USB5V: J9.1 U18.5
USB_N: U12.32 U18.1 | length 780
  Top Layer w14: U12.32@3218.33,2883.91 3217.99,2884.25 3217.99,3005.6 3280.03,3067.64 3280.03,3217 3307.83,3244.8 3307.83,3277.87 3280.03,3305.67 3280.03,3377 3380.53,3477.5 3380.53,3528.42 3388.73,3536.62 3421.73,3536.62 U18.1@3422.03,3536.92
USB_P: U12.33 U18.6 | length 780
  Top Layer w14: U12.33@3198.65,2883.91 3198.99,2884.25 3198.99,3013.47 3261.03,3075.51 3261.03,3224.87 3288.83,3252.67 3288.83,3270 3261.03,3297.8 3261.03,3384.87 3361.53,3485.37 3361.53,3528.42 3353.33,3536.62 3320.33,3536.62 U18.6@3320.03,3536.92
USBOUT_N: J9.2 U18.3 | length 198.5
  Top Layer w15: J9.2@3384.03,3777.92 3383.73,3777.62 3383.73,3696.66 3383.53,3696.46 3383.53,3623.2 3392.31,3614.42 3418.53,3614.42 U18.3@3422.03,3610.92
USBOUT_P: J9.3 U18.4 | length 198.5
  Top Layer w15: U18.4@3320.03,3610.92 3323.53,3614.42 3349.74,3614.42 3358.53,3623.2 3358.53,3706.81 3358.73,3707.02 3358.73,3777.62 J9.3@3358.44,3777.92
pads on no net: J4.7 J4.8 J9.None J9.P1 J9.P2 J9.P3 J9.P4 J9.P5 J9.P6 U1.13 U12.3 U12.4 U12.5 U12.6 U12.13 U12.14 U12.18 U12.20 U12.26 U12.28 U12.29 U12.38 U12.42 U12.43 U13.12 U13.13 U13.17 U14.12 U14.13 U14.17 U16.8 U17.8

## Polygon pours and split planes (outlines as drawn)
+3V3 on L3 (split plane): 1197.37,1248.67 1203.68,1247.73 1209.86,1246.18 1215.87,1244.03 1221.63,1241.31 1227.1,1238.03 1232.22,1234.23 1236.95,1229.95 1241.23,1225.22 1245.03,1220.1 1248.31,1214.63 1251.03,1208.87 1253.18,1202.86 1254.73,1196.68 1255.67,1190.37 1255.98,1184 1255.67,1177.63 1254.73,1171.32 1253.18,1165.14 1251.03,1159.13 1248.31,1153.37 1245.03,1147.9 1241.23,1142.78 1236.95,1138.05 1232.22,1133.77 1227.1,1129.97 1221.63,1126.69 1215.87,1123.97 1209.86,1121.82 1203.68,1120.27 1197.37,1119.33 1191,1119.02 1184.63,1119.33 1178.32,1120.27 1172.14,1121.82 1166.13,1123.97 1160.37,1126.69 1154.9,1129.97 1149.78,1133.77 1145.05,1138.05 1140.77,1142.78 1136.97,1147.9 1133.69,1153.37 1130.97,1159.13 1128.82,1165.14 1127.27,1171.32 1126.33,1177.63 1126.02,1184 1126.33,1190.37 1127.27,1196.68 1128.82,1202.86 1130.97,1208.87 1133.69,1214.63 1136.97,1220.1 1140.77,1225.22 1145.05,1229.95 1149.78,1234.23 1154.9,1238.03 1160.37,1241.31 1166.13,1244.03 1172.14,1246.18 1178.32,1247.73 1184.63,1248.67 1191,1248.98
+3V3 on L3 (split plane): 4821.37,1248.67 4827.68,1247.73 4833.86,1246.18 4839.87,1244.03 4845.63,1241.31 4851.1,1238.03 4856.22,1234.23 4860.95,1229.95 4865.23,1225.22 4869.03,1220.1 4872.31,1214.63 4875.03,1208.87 4877.18,1202.86 4878.73,1196.68 4879.67,1190.37 4879.98,1184 4879.67,1177.63 4878.73,1171.32 4877.18,1165.14 4875.03,1159.13 4872.31,1153.37 4869.03,1147.9 4865.23,1142.78 4860.95,1138.05 4856.22,1133.77 4851.1,1129.97 4845.63,1126.69 4839.87,1123.97 4833.86,1121.82 4827.68,1120.27 4821.37,1119.33 4815,1119.02 4808.63,1119.33 4802.32,1120.27 4796.14,1121.82 4790.13,1123.97 4784.37,1126.69 4778.9,1129.97 4773.78,1133.77 4769.05,1138.05 4764.77,1142.78 4760.97,1147.9 4757.69,1153.37 4754.97,1159.13 4752.82,1165.14 4751.27,1171.32 4750.33,1177.63 4750.02,1184 4750.33,1190.37 4751.27,1196.68 4752.82,1202.86 4754.97,1208.87 4757.69,1214.63 4760.97,1220.1 4764.77,1225.22 4769.05,1229.95 4773.78,1234.23 4778.9,1238.03 4784.37,1241.31 4790.13,1244.03 4796.14,1246.18 4802.32,1247.73 4808.63,1248.67 4815,1248.98
+3V3 on L3 (split plane): 1186.37,3906.67 1192.68,3905.73 1198.86,3904.18 1204.87,3902.03 1210.63,3899.31 1216.1,3896.03 1221.22,3892.23 1225.95,3887.95 1230.23,3883.22 1234.03,3878.1 1237.31,3872.63 1240.03,3866.87 1242.18,3860.86 1243.73,3854.68 1244.67,3848.37 1244.98,3842 1244.67,3835.63 1243.73,3829.32 1242.18,3823.14 1240.03,3817.13 1237.31,3811.37 1234.03,3805.9 1230.23,3800.78 1225.95,3796.05 1221.22,3791.77 1216.1,3787.97 1210.63,3784.69 1204.87,3781.97 1198.86,3779.82 1192.68,3778.27 1186.37,3777.33 1180,3777.02 1173.63,3777.33 1167.32,3778.27 1161.14,3779.82 1155.13,3781.97 1149.37,3784.69 1143.9,3787.97 1138.78,3791.77 1134.05,3796.05 1129.77,3800.78 1125.97,3805.9 1122.69,3811.37 1119.97,3817.13 1117.82,3823.14 1116.27,3829.32 1115.33,3835.63 1115.02,3842 1115.33,3848.37 1116.27,3854.68 1117.82,3860.86 1119.97,3866.87 1122.69,3872.63 1125.97,3878.1 1129.77,3883.22 1134.05,3887.95 1138.78,3892.23 1143.9,3896.03 1149.37,3899.31 1155.13,3902.03 1161.14,3904.18 1167.32,3905.73 1173.63,3906.67 1180,3906.98
+3V3 on L3 (split plane): 3617.92,3100 3618.24,3094.39 3619.18,3088.86 3620.73,3083.46 3622.88,3078.27 3625.6,3073.36 3628.85,3068.78 3629.9,3067.59 3629.9,3050 3630.29,3046.08 3631.43,3042.31 3633.29,3038.83 3635.79,3035.79 3638.83,3033.29 3642.31,3031.43 3646.08,3030.29 3650,3029.9 4354.9,3029.9 4354.9,2725 4355.29,2721.08 4356.43,2717.31 4358.29,2713.83 4360.79,2710.79 4363.83,2708.29 4367.31,2706.43 4371.08,2705.29 4375,2704.9 4383.74,2704.9 4384.6,2703.36 4387.85,2698.78 4391.59,2694.59 4395.78,2690.85 4400.36,2687.6 4405.27,2684.88 4410.46,2682.73 4415.86,2681.18 4421.39,2680.24 4427,2679.92 4979.9,2679.92 4979.9,1020.1 1020.1,1020.1 1020.1,3979.9 3617.92,3979.9
+5V on L2 (split plane): 1197.37,1248.67 1203.68,1247.73 1209.86,1246.18 1215.87,1244.03 1221.63,1241.31 1227.1,1238.03 1232.22,1234.23 1236.95,1229.95 1241.23,1225.22 1245.03,1220.1 1248.31,1214.63 1251.03,1208.87 1253.18,1202.86 1254.73,1196.68 1255.67,1190.37 1255.98,1184 1255.67,1177.63 1254.73,1171.32 1253.18,1165.14 1251.03,1159.13 1248.31,1153.37 1245.03,1147.9 1241.23,1142.78 1236.95,1138.05 1232.22,1133.77 1227.1,1129.97 1221.63,1126.69 1215.87,1123.97 1209.86,1121.82 1203.68,1120.27 1197.37,1119.33 1191,1119.02 1184.63,1119.33 1178.32,1120.27 1172.14,1121.82 1166.13,1123.97 1160.37,1126.69 1154.9,1129.97 1149.78,1133.77 1145.05,1138.05 1140.77,1142.78 1136.97,1147.9 1133.69,1153.37 1130.97,1159.13 1128.82,1165.14 1127.27,1171.32 1126.33,1177.63 1126.02,1184 1126.33,1190.37 1127.27,1196.68 1128.82,1202.86 1130.97,1208.87 1133.69,1214.63 1136.97,1220.1 1140.77,1225.22 1145.05,1229.95 1149.78,1234.23 1154.9,1238.03 1160.37,1241.31 1166.13,1244.03 1172.14,1246.18 1178.32,1247.73 1184.63,1248.67 1191,1248.98
+5V on L2 (split plane): 4821.37,1248.67 4827.68,1247.73 4833.86,1246.18 4839.87,1244.03 4845.63,1241.31 4851.1,1238.03 4856.22,1234.23 4860.95,1229.95 4865.23,1225.22 4869.03,1220.1 4872.31,1214.63 4875.03,1208.87 4877.18,1202.86 4878.73,1196.68 4879.67,1190.37 4879.98,1184 4879.67,1177.63 4878.73,1171.32 4877.18,1165.14 4875.03,1159.13 4872.31,1153.37 4869.03,1147.9 4865.23,1142.78 4860.95,1138.05 4856.22,1133.77 4851.1,1129.97 4845.63,1126.69 4839.87,1123.97 4833.86,1121.82 4827.68,1120.27 4821.37,1119.33 4815,1119.02 4808.63,1119.33 4802.32,1120.27 4796.14,1121.82 4790.13,1123.97 4784.37,1126.69 4778.9,1129.97 4773.78,1133.77 4769.05,1138.05 4764.77,1142.78 4760.97,1147.9 4757.69,1153.37 4754.97,1159.13 4752.82,1165.14 4751.27,1171.32 4750.33,1177.63 4750.02,1184 4750.33,1190.37 4751.27,1196.68 4752.82,1202.86 4754.97,1208.87 4757.69,1214.63 4760.97,1220.1 4764.77,1225.22 4769.05,1229.95 4773.78,1234.23 4778.9,1238.03 4784.37,1241.31 4790.13,1244.03 4796.14,1246.18 4802.32,1247.73 4808.63,1248.67 4815,1248.98
+5V on L2 (split plane): 1186.37,3906.67 1192.68,3905.73 1198.86,3904.18 1204.87,3902.03 1210.63,3899.31 1216.1,3896.03 1221.22,3892.23 1225.95,3887.95 1230.23,3883.22 1234.03,3878.1 1237.31,3872.63 1240.03,3866.87 1242.18,3860.86 1243.73,3854.68 1244.67,3848.37 1244.98,3842 1244.67,3835.63 1243.73,3829.32 1242.18,3823.14 1240.03,3817.13 1237.31,3811.37 1234.03,3805.9 1230.23,3800.78 1225.95,3796.05 1221.22,3791.77 1216.1,3787.97 1210.63,3784.69 1204.87,3781.97 1198.86,3779.82 1192.68,3778.27 1186.37,3777.33 1180,3777.02 1173.63,3777.33 1167.32,3778.27 1161.14,3779.82 1155.13,3781.97 1149.37,3784.69 1143.9,3787.97 1138.78,3791.77 1134.05,3796.05 1129.77,3800.78 1125.97,3805.9 1122.69,3811.37 1119.97,3817.13 1117.82,3823.14 1116.27,3829.32 1115.33,3835.63 1115.02,3842 1115.33,3848.37 1116.27,3854.68 1117.82,3860.86 1119.97,3866.87 1122.69,3872.63 1125.97,3878.1 1129.77,3883.22 1134.05,3887.95 1138.78,3892.23 1143.9,3896.03 1149.37,3899.31 1155.13,3902.03 1161.14,3904.18 1167.32,3905.73 1173.63,3906.67 1180,3906.98
+5V on L2 (split plane): 4979.9,1020.1 1020.1,1020.1 1020.1,3979.9 4979.9,3979.9

## Other copper
Top Layer:
  region net "AC Out": 4150,3798.59 4150,3550 4151.43,3551.43 4500,3551.43 4500,3482.81 4950,3482.81 4950,3649.12 4607.41,3649.12 4607.41,3800
  region net ACFUSE: 4151.43,3500 4450,3500 4450,3439.59 4700,3189.59 4700,2900 4500,2900 4500,3150 4450,3200 4150.71,3200
  region: 4151.43,3477.5
  region net "AC In": 4700,3428.37 4700,3242.07 4750,3242.07 4750,2900 4950,2900 4950,3428.37
L2 (plane layer: these items are gaps in the copper):
  circle w50: c1191,1184 r90
  circle w50: c1180,3842 r90
  circle w50: c4815,1184 r90
  region: 4150,3550
  region: 4000,4150
L3 (plane layer: these items are gaps in the copper):
  circle w50: c4815,1184 r90
  circle w50: c4815,3842 r90
  circle w50: c1180,3842 r90
  circle w50: c1191,1184 r90
  lines w100: 3668,3999 3668,3100 4427,3100 4427,2730 5000,2730

## Silkscreen, mask and mechanical layers (free items; w line width, h text height)
Top Overlay:
  lines w30: 3644,3980 3644,2731 3645,2730 5000,2730
  text "HIGH VOLTAGE" at 4005,3906 h60
  text "AC OUT" at 4753,3705 h30
  text "AC IN" at 4958,3284 h30 r90
  text "FAN POWER" at 4647,2583 h30
  text "PBLU" at 4931,2419 h30 r90
  text "-BLK" at 4931,2201.5 h30 r90
  text "+RED" at 4931,1984 h30 r90
  text "+12FAN" at 4931,1646 h30 r90
  text "GNDFAN" at 4931,1400 h30 r90
  text "DOOR SENSOR" at 4366,1143 h30 r90
  text "-Blu" at 3716,1081 h30
  text "Blk" at 3952,1081 h30
  text "+Brn" at 4141,1081 h30
  text "+12V" at 2921,1058 h30
  text "GND" at 3135,1058 h30

## Text inside footprints (layer, text, board x,y; h text height)
J4: Top Overlay "1" at 3050.33,3990.24 h30 r180; Top Overlay "2" at 3050.38,3669.58 h30 r180